# Allegro board UART_V10A.brd
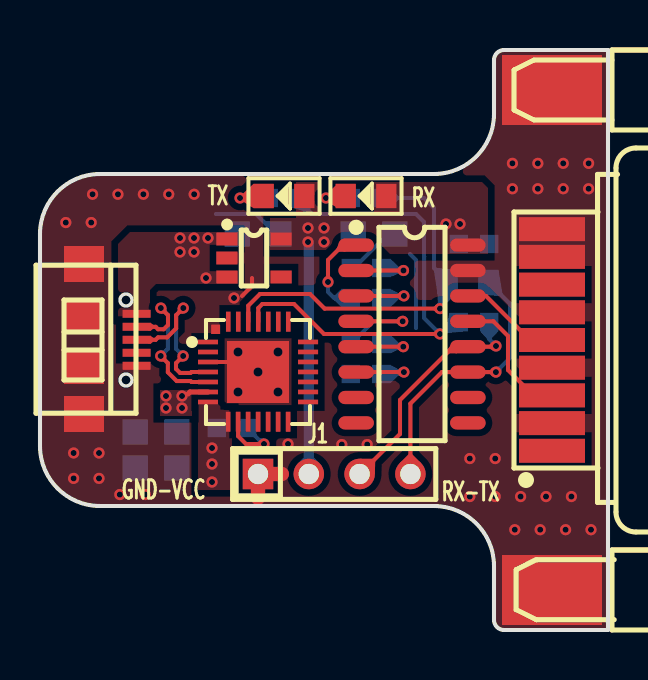
[diagram p0: board, top side]
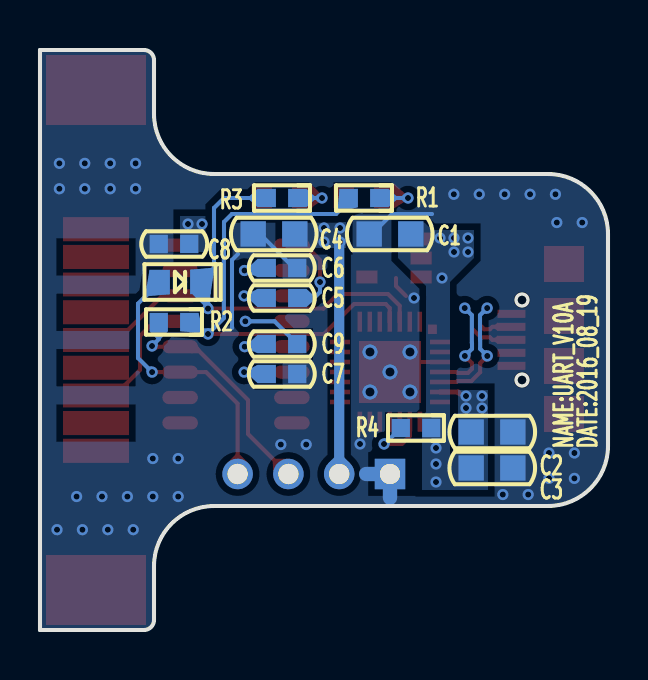
[diagram p1: board, bottom side, seen from below]

Outline 28.4 x 29 mm; copper layers: TOP, BOTTOM. Coordinates in mm from the lower left corner of the outline.
Outline path: 0,19.8 0,9.2 arc(0.88,7.08) 3,6.2 19.7,6.2 arc(21.82,5.32) 22.7,3.2 22.7,0.5 arc(22.85,0.15) 23.2,0 28.4,0 28.4,29 23.2,29 arc(22.85,28.85) 22.7,28.5 22.7,25.8 arc(21.82,23.68) 19.7,22.8 3,22.8 arc(0.88,21.92) 0,19.8

## Design rules (mm)
net group DP1: nets USB_DN USB_DP

## Placement (name value [footprint] x y rotation side)
C1  10uF_25V  [CC0805]  10.9 19.8 0 bottom
C2  10uF_25V  [CC0805]  5.8 9.9 180 bottom
C3  10uF_25V  [CC0805]  5.8 8.1 180 bottom
C4  10uF_25V  [CC0805]  16.7 19.8 0 bottom
C5  0.1uF_50V  [CC0603]  16.3 16.6 0 bottom
C6  0.1uF_50V  [CC0603]  16.3 18.1 0 bottom
C7  0.1uF_50V  [CC0603]  16.3 12.8 0 bottom
C8  0.1uF_50V  [CC0603]  21.7 19.3 180 bottom
C9  0.1uF_50V  [CC0603]  16.3 14.3 0 bottom
D1  LED_GREEN_RX  [LED0805]  12.2 21.7 180 top
D2  LED_RED_TX  [LED0805]  16.3 21.7 180 top
D3  RLS4148  [0805F]  21.4 17.4 180 bottom
J1  -  [HEADER4X1_2R54]  10.9 7.8 0 top
J2  DB9-M  [DB9-M-SMT]  25.6 14.5 270 top
NOREF  -  []  25.3 0 90 top
NOREF#2  -  []  0 10.4 0 top
R1  1K  [RC0603]  12.2 21.6 180 bottom
R2  300R  [RC0603]  21.7 15.4 180 bottom
R3  1K  [RC0603]  16.3 21.6 180 bottom
R4  10K  [RC0603]  9.6 10.1 180 bottom
U1  CP2102  [QFN-28]  8.4 14.4 0 top
U2  SPX3819M5-L-3-3/TR  [SOT23-5]  10.7 18.6 270 top
U3  MAX3232ESE+  [SOP-16]  18.6 14.8 270 top
USB1  USB-MICRO_USB232  [USB-MICRO]  4.9 14.5 270 top

## Library data of the parts
C1-C4 = CAP NP_2
C5-C9 = CAP NP
D1 D2 = LED_4
D3 = DIODE13_7
J1 = CONN RCPT 4
J2 = DB9-F_0
R1-R4 = R_Generic
U1 = CP2102
U2 = SPX3819M5-L-1-2
U3 = ADM202_0
USB1 = USB-MICRO

## Footprints (pads in the part's own frame, mm; a bottom-side part is the same pattern mirrored in y, then rotated)
0805F
  rect 1.016x1.219 smd: 1(-1.016,0) 2(1.016,0)
CC0603
  rect 0.914x0.914 smd: 1(-0.762,0) 2(0.762,0)
CC0805
  rect 1.27x1.27 smd: 1(-1.041,0) 2(1.041,0)
DB9-M-SMT
  rect 1.2x3.3 smd: 1(5.54,0) 2(2.77,0) 3(0,0) 4(-2.77,0) 5(-5.54,0) 6(4.155,0) 7(1.385,0) 8(-1.385,0) 9(-4.155,0)
  rect 3.5x5 smd: 10(12.5,0) 11(-12.5,0) 12(12.5,0) 13(-12.5,0)
HEADER4X1_2R54
  rect 1.524x1.524 hole 1.016: 1(0,0)
  round 1.524 hole 1.016: 2(2.54,0) 3(5.08,0) 4(7.62,0)
LED0805
  rect 1.016x1.219 smd: 1(-1.016,0) 2(1.016,0)
QFN-28
  rect 1x0.23 smd: 1(0,0) 2(0,-0.5) 3(0,-1) 4(0,-1.5) 5(0,-2) 6(0,-2.5) 7(0,-3) 15(5.003,-2.998) 16(5.003,-2.498) 17(5.003,-1.998) 18(5.003,-1.498) 19(5.003,-0.998) 20(5.003,-0.498) 21(5.003,0.002)
  rect 0.23x1 smd: 8(1.006,-3.987) 9(1.506,-3.987) 10(2.006,-3.987) 11(2.506,-3.987) 12(3.006,-3.987) 13(3.506,-3.987) 14(4.006,-3.987) 22(4.014,1.016) 23(3.514,1.016) 24(3.014,1.016) 25(2.514,1.016) 26(2.014,1.016) 27(1.514,1.016) 28(1.014,1.016)
  rect 0.45x0.47 smd: 29(0.381,0.635)
  rect 3.1x3.1 smd: 30(2.5,-1.5)
RC0603
  rect 0.914x0.914 smd: 1(-0.762,0) 2(0.762,0)
SOP-16
  oval 0.66x1.778 smd: 1(-4.445,-2.794) 2(-3.175,-2.794) 3(-1.905,-2.794) 4(-0.635,-2.794) 5(0.635,-2.794) 6(1.905,-2.794) 7(3.175,-2.794) 8(4.445,-2.794) 9(4.445,2.794) 10(3.175,2.794) 11(1.905,2.794) 12(0.635,2.794) 13(-0.635,2.794) 14(-1.905,2.794) 15(-3.175,2.794) 16(-4.445,2.794)
SOT23-5
  rect 0.65x1.06 smd: 1(-0.95,-1.354) 2(0,-1.354) 3(0.95,-1.354) 4(0.95,1.354) 5(-0.95,1.354)
USB-MICRO
  rect 0.4x1.4 smd: 1(-1.31,-0.07) 2(-0.66,-0.07) 3(-0.01,-0.07) 4(0.64,-0.07) 5(1.29,-0.07)
  rect 1.8x2 smd: 6(-3.8,-2.7) 7(-1.2,-2.7) 8(1.3,-2.7) 9(3.7,-2.7)

## Nets
GND: C1.2 C2.2 C3.2 C4.2 C6.1 C7.1 C8.1 J1.1 J2.5 J2.10 J2.11 J2.12 J2.13 U1.3(GND_1) U1.29(GND_2) U1.30(GND_3) U2.2(GND) U3.15(GND) USB1.5(GND) USB1.6(P_2) USB1.7(P_1) USB1.8(P_3) USB1.9(P_4)
VCC_3.3V: C4.1 C8.2 D1.1(ANODE) D2.1(ANODE) J1.2 U2.5(VOUT) U3.16(VCC)
VCC_VUSB: C1.1 C3.1 R4.2 U1.7(REGIN) U1.8(VBUS) U2.1(VIN) U2.3(EN) USB1.1(VBUS)
RS232_RXD: J2.3 U3.14(TOUT1)
RS232_TXD: J2.2 U3.13(RIN1)
RXD: J1.3 R2.1 U3.12(ROUT1)
TXD: D3.1(ANODE) J1.4 U3.11(TIN1)
USB_DN: U1.5(D-) USB1.2(D-)
USB_DP: U1.4(D+) USB1.3(D+)
N11638713: C2.1 U1.6(VDD)
N11638764: R4.1 U1.9(R\S\T\)
N11638791: D1.2(CATHODE) R1.2
N11639184: D3.2(CATHODE) R3.1 U1.26(TXD)
N11639199: R1.1 R2.2 U1.25(RXD)
N11774127: D2.2(CATHODE) R3.2
N16385452: C5.1 U3.1(C1+)
N16385456: C9.2 U3.5(C2-)
N16385468: C9.1 U3.4(C2+)
N16385472: C5.2 U3.3(C1-)
N16385512: C7.2 U3.6(V-)
N163855828: C6.2 U3.2(V+)

Pads without a net: J2 1 4 6 7 8 9; U1 1 2 10 11 12 13 14 15 16 17 18 19 20 21 22 23 24 27 28; U2 4; U3 7 8 9 10; USB1 4

## Via types
v1: diameter 0.559, hole 0.305, TOP to BOTTOM, 72 vias
v2: diameter 0.762, hole 0.457, TOP to BOTTOM, 5 vias

## Routing (per net, layer and track width the routed paths; a pad name or vN(x,y) marks a point on that pad's centre or on a via; arc(x,y) is an arc through that point)
GND: length 19
  TOP w0.203: v2(10.9,12.9) 10.4,13.4 U1.3 ; 10.1,16.7 10.6,17.2 10.6,17.6
  TOP w0.711: 10.9,6.61 J1.1 12.09,7.8
  BOTTOM w0.203: 18.8,15.1 18.8,18.5 18.5,18.8 ; C1.2 11.8,19.8 10.8,20.8 8.8,20.8 ; C6.1 15.7,18.1 17.24,19.64 17.24,19.8 C4.2
  BOTTOM w0.711: 10.9,6.61 J1.1 12.09,7.8
  vias: v1(1.29,20.37) v1(1.68,8.85) v1(1.68,7.58) v1(2.63,21.79) v1(2.56,20.37) v1(2.95,8.85) v1(2.95,7.58) v1(3.9,21.79) v1(3.99,6.77) v1(5.17,21.79) v1(5.26,6.77) v1(6.44,21.79) v1(7.71,21.79) v1(9.7,16.6) v1(12.4,9.3) v1(15.09,9.27) v1(16.36,9.27) v1(21.49,8.57) v1(21.49,6.67) v1(22.76,8.57) v1(22.76,6.67) v1(23.62,23.33) v1(23.62,22.06) v1(23.74,5.02) v1(24.03,6.67) v1(24.89,23.33) v1(24.89,22.06) v1(25.01,5.02) v1(25.3,6.67) v1(26.16,23.33) v1(26.16,22.06) v1(26.28,5.02) v1(26.57,6.67) v1(27.43,23.33) v1(27.43,22.06) v1(27.55,5.02) v2(9.9,13.9) v2(9.9,11.9) v2(11.9,13.9) v2(11.9,11.9)
VCC_3.3V: length 11.6
  BOTTOM w0.508: J1.2 13.44,19.36 v1(13.4,19.4)
  vias: v1(13.4,20.1) v1(14.2,20.1) v1(14.2,19.4) v1(20.3,20.3) v1(21,20.3)
VCC_VUSB:
  vias: v1(7,19.6) v1(7,18.9) v1(7.7,19.6) v1(7.7,18.9) v1(8.3,17.6) v1(8.4,19.6) v1(8.6,9.1) v1(8.6,8.3) v1(8.6,7.4)
RS232_RXD: length 5.1
  TOP w0.203: J2.3 24.5,14.5 22.3,16.7 21.39,16.7
RS232_TXD: length 6.7
  TOP w0.203: U3.13 22.66,15.44 23.4,14.7 23.4,13 24.67,11.73 J2.2
RXD: length 11.8
  TOP w0.203: J1.3 16,7.8 18,9.8 18,11.5 20.66,14.16 22.77,14.16 v1(22.8,14.2)
  BOTTOM w0.203: v1(22.8,14.2) 22.46,14.54 R2.1
TXD: length 13.7
  TOP w0.203: v1(22.8,12.89) U3.11 20.09,12.89 18.52,11.32 J1.4
  BOTTOM w0.203: v1(22.8,12.89) 23.5,13.6 23.5,16.32 D3.1
USB_DN: length 8.6
  TOP w0.203: U1.5 7.57,12.4 7.53,12.45 6.83,12.45 6.39,12.89 6.39,13.34 v1(6.04,13.7) ; USB1.2 5.78,15.16 5.9,15.04 6.19,15.04 6.4,15.25 6.4,15.74 v1(6.04,16.1)
  BOTTOM w0.203: v1(6.04,16.1) 6.4,15.74 6.4,14.52 6.39,14.51 6.39,14.06 v1(6.04,13.7)
USB_DP: length 8.6
  TOP w0.203: v1(7.16,16.1) 6.81,15.74 6.81,15.08 6.36,14.63 5.9,14.63 5.78,14.51 USB1.3 ; U1.4 7.57,12.9 7.53,12.85 7,12.85 6.8,13.06 6.8,13.34 v1(7.16,13.7)
  BOTTOM w0.203: v1(7.16,13.7) 6.8,14.06 6.8,14.35 6.81,14.35 6.81,15.74 v1(7.16,16.1)
N11638713: length 1
  TOP w0.254: U1.6 7.5,11.9 7.4,11.8
  vias: v1(6.3,11.7) v1(6.3,11.1) v1(7.1,11.7) v1(7.1,11.1)
N11638764: length 3.3
  TOP w0.203: v1(11.2,9.3) 10.3,9.3 9.91,9.69 U1.9
  BOTTOM w0.203: v1(11.2,9.3) 11.16,9.3 R4.1
N11638791: length 2.7
  TOP w0.203: D1.2 11.08,21.6 v1(10,21.6)
  BOTTOM w0.203: R1.2 v1(10,21.6)
N11639184: length 19.2
  TOP w0.203: v1(20,16.07) 14.23,16.07 13.5,16.8 11,16.8 10.41,16.21 U1.26
  BOTTOM w0.203: v1(20,16.07) 20,17.02 D3.2 20.38,17.42 19.7,18.1 19.7,21.1 19.2,21.6 R3.1
N11639199: length 24.4
  TOP w0.203: U1.25 10.91,16.1 11.12,16.3 12.7,16.3 14.2,14.8 v1(20,14.8)
  BOTTOM w0.203: R1.1 12.96,21.44 13.6,20.8 18.8,20.8 19.2,20.4 19.2,18.67 19.21,18.67 19.21,15.59 v1(20,14.8) 20.2,14.8 20.8,15.4 R2.2
N11774127: length 2.3
  TOP w0.203: D2.2 15.18,21.6 v1(14.3,21.6)
  BOTTOM w0.203: R3.2 v1(14.3,21.6)
N16385452: length 4.6
  TOP w0.203: v1(14.4,17.4) 14.4,18.5 15.14,19.25 U3.1
  BOTTOM w0.203: v1(14.4,17.4) 14.4,16.9 14.7,16.6 C5.1
N16385456: length 3.5
  TOP w0.203: 15.81,14.16 v1(18.16,14.16)
  BOTTOM w0.203: v1(18.16,14.16) 17.2,14.16 C9.2
N16385468: length 5.4
  TOP w0.203: U3.4 v1(18.14,15.44)
  BOTTOM w0.203: v1(18.14,15.44) 16.67,15.44 C9.1
N16385472: length 3.6
  TOP w0.203: 15.81,16.7 v1(18.2,16.7)
  BOTTOM w0.203: v1(18.2,16.7) 17.17,16.7 C5.2
N16385512: length 3.6
  TOP w0.203: U3.6 v1(18.2,12.89)
  BOTTOM w0.203: C7.2 17.16,12.89 v1(18.2,12.89)
N163855828: length 3.5
  TOP w0.203: U3.2 v1(18.18,17.98)
  BOTTOM w0.203: v1(18.18,17.98) 17.19,17.98 C6.2

## Copper pours and planes (outline as drawn; the poured copper is in the pictures)
VCC_3.3V on TOP: 11.5,20.6 12.8,20.6 12.8,22.4 13.9,22.4 13.9,20.9 16.7,20.9 16.7,22.4 22.1,22.4 22.4,22.1 22.4,18.8 17.5,18.8 16.7,19.6 14.9,19.6 14.3,19 11.5,19
VCC_3.3V on BOTTOM: 16.3,20.4 16.3,19.1 13.1,19.1 13.1,20.4
VCC_3.3V on BOTTOM: 21.4,18.9 21.4,20.7 20,20.7 20,18.9
VCC_VUSB on TOP: 5.5,15.6 5.5,17 5.8,17.3 9.9,17.3 9.9,18 8.5,18 8.5,19.2 9.9,19.2 9.9,19.9 4.5,19.9 3.9,19.3 3.9,15.6
VCC_VUSB on TOP: 7.9,11.5 7.9,7 9.6,7 9.6,11 9.2,11 8.9,11.3 8.9,11.5
VCC_VUSB on BOTTOM: 6,7 6,8.8 7.9,8.8 7.9,17.4 6.7,18.6 6.7,20 8.8,20 9.2,20.4 10.5,20.4 10.5,18.6 9.1,17.2 9.1,10.9 9.3,10.7 9.3,7
TXD on BOTTOM (solid shape): 23.13,16.8 23.1,16.72 23.03,16.69 21.91,16.79 22.4,17.42 22.92,18.01
N11638713 on TOP: 8.9,12 6,12 6,10.7 7.6,10.7 7.6,11.5 7.9,11.8 8.9,11.8
N11638713 on BOTTOM: 7.5,12 6,12 6,9.2 7.5,9.2
N11639184 on BOTTOM (solid shape): 20.89,18.01 20.4,17.38 19.88,16.79 19.69,18 19.72,18.08 19.79,18.11
GND on TOP: 0.1,19.8 0.94,21.86 3,22.7 19.7,22.7 21.89,23.61 22.8,25.8 22.8,28.5 22.9,28.8 23.2,28.9 28.3,28.9 28.3,0.1 23.2,0.1 22.9,0.2 22.8,0.5 22.8,3.2 21.9,5.4 19.7,6.3 3,6.3 0.93,7.13 0.1,9.2 ; 4 cut-outs
GND on BOTTOM: 0.1,19.8 0.94,21.86 3,22.7 19.7,22.7 21.89,23.61 22.8,25.8 22.8,28.5 22.9,28.8 23.2,28.9 28.3,28.9 28.3,0.1 23.2,0.1 22.9,0.2 22.8,0.5 22.8,3.2 21.9,5.4 19.7,6.3 3,6.3 0.93,7.13 0.1,9.2 ; 1 cut-out
VCC_3.3V on BOTTOM (solid shape): 13.26,8.7 13.44,8.77 13.62,8.7 13.98,8.34 13.44,7.74 12.9,8.34
TXD on TOP (solid shape): 18.45,8.81 18.52,8.84 18.59,8.81 19.06,8.34 18.52,7.77 17.98,8.34
N11638791 on TOP (solid shape): 11.21,21.7 10.68,21.09 10,21.52 9.97,21.59 9.99,21.67 10.68,22.31
N11639184 on BOTTOM (solid shape): 20.78,16.79 20.06,16.08 19.96,16.06 19.9,16.14 19.88,16.89 20.39,17.42
N11639199 on BOTTOM (solid shape): 13.52,20.98 13.48,20.9 13.4,20.88 12.5,21.14 12.95,21.62 13.42,22.06
N11639199 on BOTTOM (solid shape): 20.96,15.42 21.4,14.94 20.34,14.84 20.27,14.88 20.24,14.96 20.48,15.86
N11774127 on TOP (solid shape): 15.31,21.7 14.8,21.14 14.23,21.52 14.2,21.59 14.22,21.66 14.78,22.22

Small or netless copper shapes (teardrops, artwork), in the pictures only: 22 on TOP, 27 on BOTTOM

## Text on the board
Ref Des/Silkscreen Bottom: DATE:2016_08_19 | NAME:UART_V10A
Ref Des/Silkscreen Top: GND-VCC | TX | RX | RX-TX
DIMENSION: FIGURE | SIZE | 0.3048 | 0.4572 | 1.016 | DRILL CHART: TOP to BOTTOM | ALL UNITS ARE IN MILLIMETERS | PLATED | QTY | 72 | 5 | 4
